# Altium PCB PCB.PcbDoc
Units mm, origin at the board's own origin, x right, y up, seen from the top; angles counter-clockwise.
Board outline 123.95 x 166.88 mm, 2 copper layers (Top Layer, Bottom Layer); 61 components, 65 nets, 280 pads, 86 vias.
Unrouted connection lines stored in the file: 112.
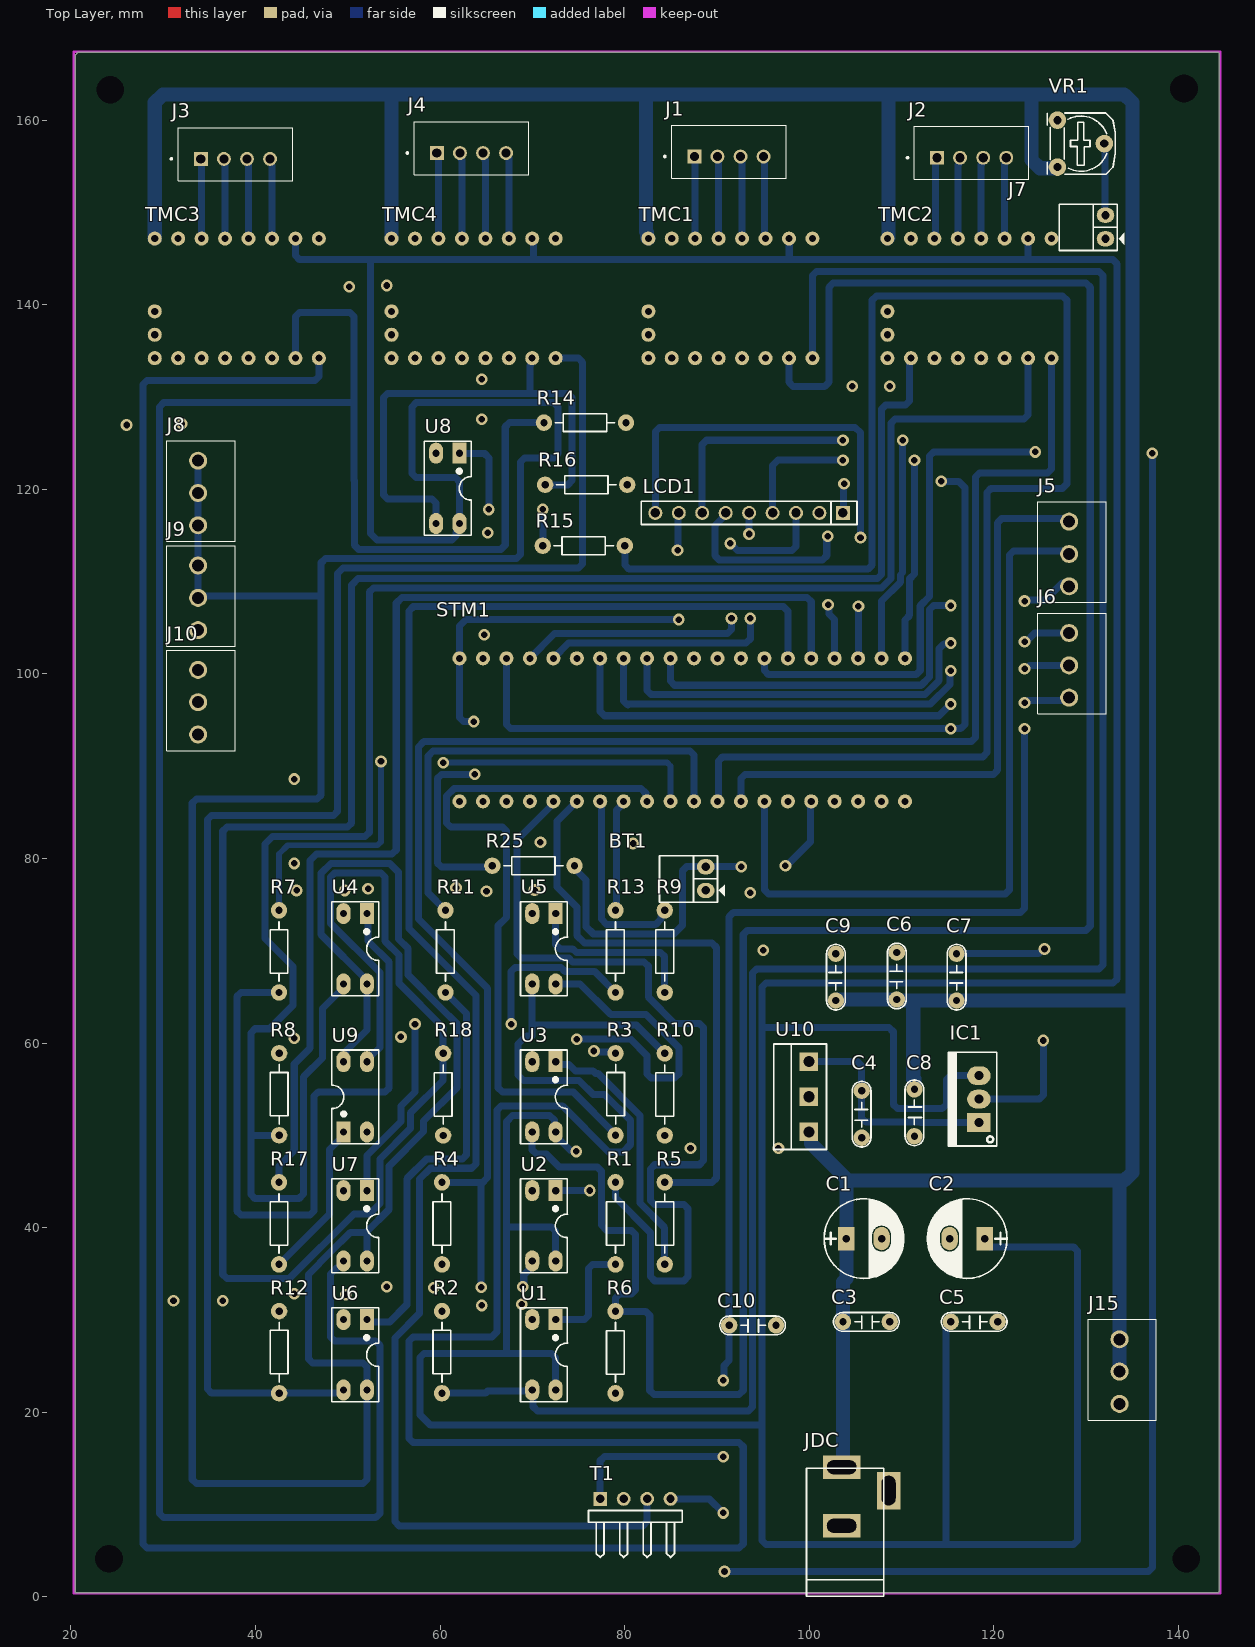
[diagram p0: Top Layer view]
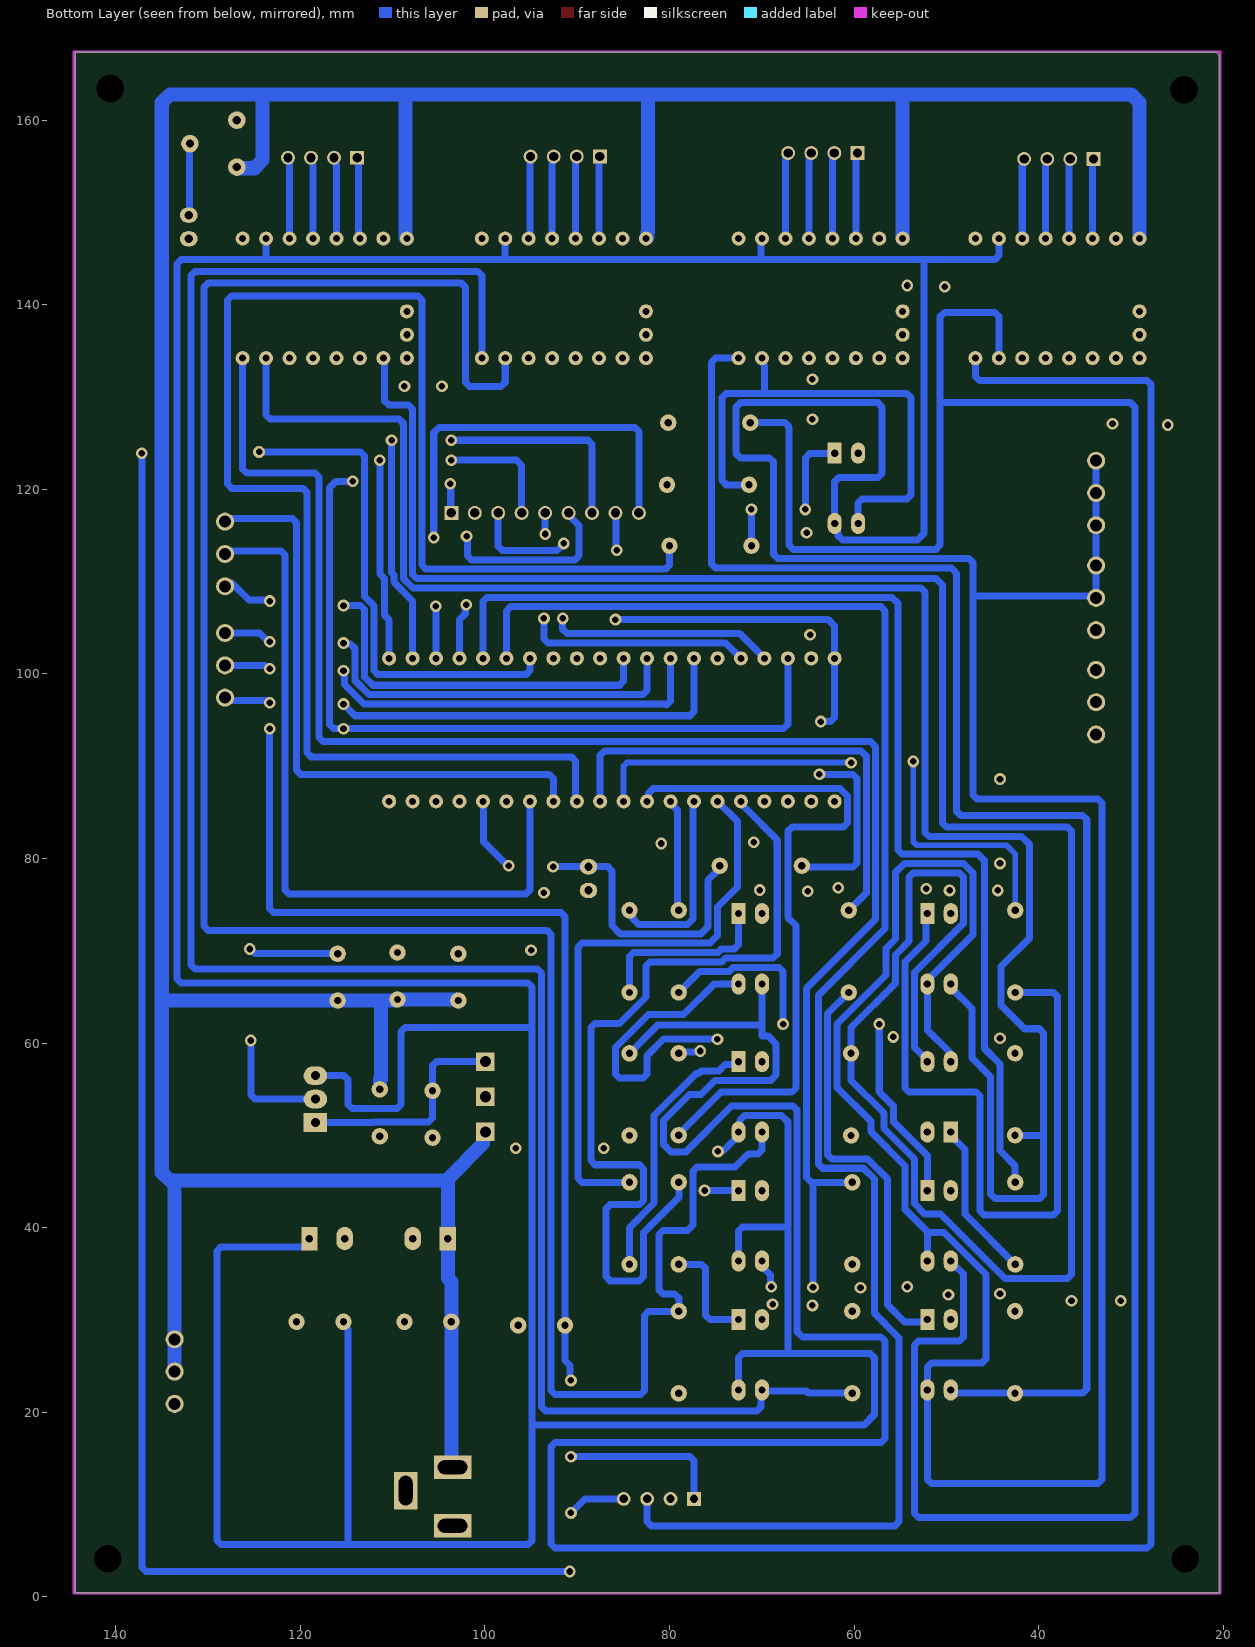
[diagram p1: Bottom Layer view, seen from below]

## Layer stack, top to bottom
Top Solder: solder mask 0.0102, Solder Resist, Dk 3.5
Top Layer: signal copper 0.0356
Dielectric 1: dielectric 0.32, FR-4, Dk 4.8
Bottom Layer: signal copper 0.0356
Bottom Solder: solder mask 0.0102, Solder Resist, Dk 3.5

## Board outline
144.272,0.47 ccw(c144.272,0.597) 144.399,0.597 144.399,167.221 ccw(c144.272,167.221) 144.272,167.348 20.828,167.348 ccw(c20.828,167.221) 20.737,167.311 20.738,167.311 20.484,167.057 ccw(c20.574,166.967) 20.447,166.967 20.447,0.597 ccw(c20.574,0.597) 20.574,0.47

## Design rules (kind name [scope] priority, off if disabled: settings)
Clearance [All] p1: gap=0.254 ignorepadtopadclearanceinfootprint=FALSE
PolygonConnect [All] p1: connectstyle=Relief reliefconductorwidth=0.254 reliefentries=4 polygonreliefangle="90 Angle" airgapwidth=0.254
RoomDefinition sch [InComponentClass('sch')] p1: confinementstyle=ConfineIn formatcopy=TRUE lockcomponents=FALSE outline 184.404,12.827 192.659,12.827 192.659,27.178 184.404,27.178
RoutingVias [All] p1: holewidth=0.711 width=1.27 viastyle="Through Hole" minholewidth=0.711 minwidth=1.27 maxholewidth=0.711 maxwidth=1.27
SolderMaskExpansion [All] p1: expansion=0.102 istentingtop=FALSE
Width [All] p1: maxlimit=0.762 minlimit=0.635 preferedwidth=0.635
30 further rules are at their usual default settings.

## Components (designator, comment, footprint, x,y, rotation, side; value= is the part's Value field where it differs from the comment)
BT1 "Jumper 2" jp2h 88.773,76.543 r90 top value="JP 2"
C1 "100uF" CP1.5/3.4 104.013,38.824 r0 top value=100uF/35V/50V
C2 "100uF" CP1.5/3.4 118.999,38.824 r180 top value=100uF/35V/50V
C3 "100nF" CN2 108.712,29.807 r180 top value=0.1uF
C4 "100nF" CN2 105.664,49.758 r90 top value=0.1uF
C5 "100nF" CN2 120.396,29.807 r180 top value=0.1uF
C6 "100nF" CN2 109.474,64.732 r90 top value=0.1uF
C7 "100nF" CN2 115.951,64.605 r90 top value=0.1uF
C8 "100nF" CN2 111.379,54.991 r270 top value=0.1uF
C9 "100nF" CN2 102.87,64.605 r90 top value=0.1uF
C10 "100nF" CN2 96.393,29.426 r180 top value=0.1uF
IC1 "LM7805" QTO-220 118.364,51.397 r90 top
J1 "B4B-XH-A" JST_B4B-XH-A(LF)(SN) 91.293,156.57 r0 top
J2 "B4B-XH-A" JST_B4B-XH-A(LF)(SN) 117.582,156.443 r0 top
J3 "B4B-XH-A" JST_B4B-XH-A(LF)(SN) 37.826,156.316 r0 top
J4 "B4B-XH-A" JST_B4B-XH-A(LF)(SN) 63.393,156.951 r0 top
J5 "Terminals" 691214110003 128.143,112.992 r270 top
J6 "Terminals" 691214110003 128.143,100.927 r270 top
J7 "Jumper 2" jp2h 132.08,147.13 r90 top value="JP 2"
J8 "Terminals" 691214110003 33.782,119.596 r270 top
J9 "Terminals" 691214110003 33.782,108.237 r270 top
J10 "Terminals" 691214110003 33.782,96.934 r270 top
J15 "Terminals" 691214110003 133.604,24.417 r270 top
JDC "Jac DC" DC-IN 106.045,10.884 r90 top
LCD1 "LCD TFT 2.2" JP9-C1T 93.472,117.437 r180 top
R1 "1k" R1/4W 78.994,44.92 r270 top value="R1/4W - 1K"
R2 "1k" R1/4W 60.198,22.075 r90 top value="R1/4W - 1K"
R3 "1k" R1/4W 79.006,50.015 r90 top value="R1/4W - 1K"
R4 "1k" R1/4W 60.198,44.92 r270 top value="R1/4W - 1K"
R5 "1k" R1/4W 84.328,44.92 r270 top value="R1/4W - 1K"
R6 "1k" R1/4W 78.994,30.95 r270 top value="R1/4W - 1K"
R7 "1k" R1/4W 42.545,74.384 r270 top value="R1/4W - 1K"
R8 "1k" R1/4W 42.557,50.015 r90 top value="R1/4W - 1K"
R9 "1k" R1/4W 84.328,74.384 r270 top value="R1/4W - 1K"
R10 "1k" R1/4W 84.328,58.89 r270 top value="R1/4W - 1K"
R11 "1k" R1/4W 60.579,74.384 r270 top value="R1/4W - 1K"
R12 "1k" R1/4W 42.557,22.075 r90 top value="R1/4W - 1K"
R13 "1k" R1/4W 78.994,74.384 r270 top value="R1/4W - 1K"
R14 "1k" R1/4W 71.247,127.216 r0 top value="R1/4W - 1K"
R15 "1k" R1/4W 80.01,113.881 r180 top value="R1/4W - 1K"
R16 "1k" R1/4W 71.374,120.485 r0 top value="R1/4W - 1K"
R17 "1k" R1/4W 42.545,44.92 r270 top value="R1/4W - 1K"
R18 "1k" R1/4W 60.325,58.89 r270 top value="R1/4W - 1K"
R25 "1k" R1/4W 74.549,79.21 r180 top value="R1/4W - 1K"
STM1 "stm32f103c8t6" STM32F103 110.363,101.689 r270 top
T1 "UART" HDR1X4H 77.343,10.63 r0 top
TMC1 "tmc2209" TMC2209 100.33,147.155 r270 top
TMC2 "tmc2209" TMC2209 126.238,147.155 r270 top
TMC3 "tmc2209" TMC2209 46.863,147.155 r270 top
TMC4 "tmc2209" TMC2209 72.517,147.155 r270 top
U1 "PC817" DIP4/W0.3 72.517,30.048 r180 top
U2 "PC817" DIP4/W0.3 72.517,44.018 r180 top
U3 "PC817" DIP4/W0.3 72.517,57.988 r180 top
U4 "PC817" DIP4/W0.3 52.07,74.031 r180 top
U5 "PC817" DIP4/W0.3 72.517,74.031 r180 top
U6 "PC817" DIP4/W0.3 52.07,30.048 r180 top
U7 "PC817" DIP4/W0.3 52.07,44.018 r180 top
U8 "PC817" DIP4/W0.3 62.103,123.914 r180 top
U9 "PC817" DIP4/W0.3 49.53,50.368 r0 top
U10 "7809" "HDR1x3 BIG" 99.949,50.379 r90 top
VR1 "10K" VR 126.873,159.982 r270 top value="VR 10K"

## Footprints (in the part's own frame and the unit in brackets; to place one, negate y for a bottom-side part, rotate by r counter-clockwise, add the part's x,y. Pads: shape width x height; smd on the part's side, far side on the other; paste and mask are expansions set on the pad)
691214110003 [mm]
  round 1.95 hole 1.3: 1(-3.5,0) 2(0,0) 3(3.5,0)
  silkscreen extent -5.65,-3.4 5.25,4
CN2 [mil]
  round 70 hole 31: 1(0,0) 2(200,0)
  silkscreen extent -40,-40 240,40, body extent -54,-44 260,55, height 407
CP1.5/3.4 [mil] "Tu hoa 220->470uF,16V, 470uF/16V,25V"
  rect 70x100 hole 32: 1(0,0)
  oval 70x100 hole 32: 2(150,0)
  silkscreen extent -95,-170 245,170, body extent -85,-157 230,157, height 446
DC-IN [mm] "Jac DC input"
  rect 2.54x4.064 hole 1.5 slot 3.2 at 90 deg: 1(3.175,2.54) 2(-3.175,2.54)
  rect 4.064x2.54 hole 1.5 slot 3.2 at 0 deg: 3(0.635,-2.54)
  silkscreen extent -10.79,-2.03 3.05,6.35, body extent -10.42,-2.67 3.4,6.84, height 11.02
DIP4/W0.3 [mil] "4 PIN, W 300mil, Pin to pin 100mil"
  rect 60x90 hole 31: 1(0,0)
  oval 60x90 hole 31: 2(100,0) 3(100,300) 4(0,300)
  silkscreen extent -50,-50 150,350, body extent -59,-10 159,305, height 170
"HDR1x3 BIG" [mm] "3 chan cam 7805, BJT to, FET to..."
  rect 2x2 / inner round 1.575 / far side rect 2x2 hole 1.2: 1(0,0) 2(3.81,0) 3(7.62,0)
  silkscreen extent -1.91,-1.91 9.52,3.81
HDR1X4H [mm] "Connector; Header; 4 Position; Right Angle"
  rect 1.5x1.5 hole 0.9: 1(0,0)
  round 1.5 hole 0.9: 2(2.54,0) 3(5.08,0) 4(7.62,0)
  silkscreen extent -1.27,-6.35 8.89,-1.27, body extent -1.27,-7 8.89,1.27, height 4.33
jp2h [mil]
  oval 65x75 hole 36: 1(0,0) 2(101,0)
  silkscreen extent -50,-81 148,197, body extent -44,-14 148,424, height 99
JP9-C1T [mm] "9 row, straight, gold plating"
  rect 1.52x1.52 hole 1.02: 1(-10.16,0)
  round 1.52 hole 1.02: 2(-7.62,0) 3(-5.08,0) 4(-2.54,0) 5(0,0) 6(2.54,0) 7(5.08,0) 8(7.62,0) 9(10.16,0)
  silkscreen extent -11.68,-1.27 11.68,1.27, body extent -11.68,-1.25 11.68,1.25, height 8.51
JST_B4B-XH-A(LF)(SN) [mm]
  rect 1.508x1.508 hole 1: 1(-3.75,-0.525)
  round 1.508 hole 1: 2(-1.25,-0.525) 3(1.25,-0.525) 4(3.75,-0.525)
  silkscreen extent -7.05,-2.87 6.2,2.88
QTO-220 [mil] "TO-220 - 1-2-3"
  rect 80x100 hole 39: 1(0,0)
  oval 80x100 hole 39: 2(100,0) 3(200,0)
  silkscreen extent -100,-76 300,130, body extent -119,-64 322,121, height 755
R1/4W [mil] "R 1/4W, 2 Pin, 350mil"
  round 70 hole 31: 1(0,0) 2(350,0)
  silkscreen extent 48,-38 302,38, body extent -40,-47 386,47, height 111
STM32F103 [mil]
  round 60 hole 30: 1(610,-1900) 2(610,-1800) 3(610,-1700) 4(610,-1600) 5(610,-1500) 6(610,-1400) 7(610,-1300) 8(610,-1200) 9(610,-1100) 10(610,-1000) 11(610,-900) 12(610,-800) 13(610,-700) 14(610,-600) 15(610,-500) 16(610,-400) 17(610,-300) 18(610,-200) 19(610,-100) 20(610,0) 21(0,0) 22(0,-100) 23(0,-200) 24(0,-300) 25(0,-400) 26(0,-500) 27(0,-600) 28(0,-700) 29(0,-800) 30(0,-900) 31(0,-1000) 32(0,-1100) 33(0,-1200) 34(0,-1300) 35(0,-1400) 36(0,-1500) 37(0,-1600) 38(0,-1700) 39(0,-1800) 40(0,-1900)
  body extent -147,-2010 759,265, height 358
TMC2209 [mil]
  round 60 hole 30: 1(0,0) 2(0,-100) 3(0,-200) 4(0,-300) 5(0,-400) 6(0,-500) 7(0,-600) 8(0,-700) 9(310,-700) 10(410,-700) 11(510,-700) 12(510,-600) 13(510,-500) 14(510,-400) 15(510,-300) 16(510,-200) 17(510,-100) 18(510,0)
  body extent -45,-750 555,50, height 541
VR [mil] "Resistor Variable"
  round 75 hole 35: 1(0,0) 2(100,200) 3(200,0)
  silkscreen extent -31,-44 231,246, body extent -87,-30 307,372, height 165

## Part data
BT1 J7: library part "JP 2"
C1 C2: library part CP3, "Cap 100uF/35V - 470uF/16V", Description 1="1000uF/6,3V - 470uF/16V - 330uF - 25V", Description 2="220uF/35V - 100uF/50V - 63V - 4,7uF/200V", Description 3="22uF => 33uF100V - 3,3uF => 4,7uF/250V", Description 4="2,2uF =>3,3uF/350 - 2,2uF/400V - 1uF/450V"
C3 C4 C5 C6 C7 C8 C9 C10: library part CN2, "Cap np 104 => 105pF"
IC1: library part LM78xx, "On ap +, from + 5 to + 24VDC"
J1 J2 J3 J4: library part B4B-XH-A(LF)(SN), Package=None, Availability=Unavailable, MP=B4B-XH-A(LF)(SN), Price=None
J5 J6 J8 J9 J10 J15: library part 691214110003, "3 Position Wire to Board Terminal Block Horizontal with Board 0.138 (3.50mm) Through Hole", Package=None, Availability="In Stock", Check_prices=https://www.snapeda.com/parts/691214110003/Wurth+Elektronik/view-part/?ref=eda, MF="Wurth Elektronik", MP=691214110003, Price=None, Purchase-URL=https://pricing.snapeda.com/search/part/691214110003/?ref=eda, SnapEDA_Link=https://www.snapeda.com/parts/691214110003/Wurth+Elektronik/view-part/?ref=snap
JDC: library part DCIN, "Jac DC input"
LCD1: Manufacturer="W¨¹rth Elektronik eiSos GmbH", partNo=613009143121, ComponentLink1 Description=Manufacturer, ComponentLink1URL=http://www.we-online.com, ComponentLink2 Description=Datasheet, ComponentLink2URL=http://katalog.we-online.de/em/datasheet/6130xx143121.pdf, Created by="Karrer Zheng", Created Date="29 March 2013", NoPins=09
R1 R2 R3 R4 R5 R6 R7 R8 R9 R10 R11 R12 R13 R14 R15 R16 R17 R18 R25: library part R1/4W, "Resistor 1/4W"
STM1: library part STM32F103
T1: library part TouchPanel, "4 wires", Creator="Nguyen Ba Bien", Date Created=14-04-2010
TMC1 TMC2 TMC3 TMC4: library part Driver_TMC2209
U1 U2 U3 U4 U5 U6 U7 U8 U9: "Single Opto"
U10: "Positive Voltage Regulator", ComponentLink1Description="Manufacturer Link", ComponentLink1URL=http://www.st.com/, ComponentLink2Description=Datasheet, ComponentLink2URL=http://www.st.com/stonline/products/literature/ds/2146/l78m05c.pdf, DatasheetVersion=Apr-1994, LatestRevisionDate=17-Jul-2002, LatestRevisionNote="Re-released for DXP Platform.", Note="Tab is connected to pin 3 (GND).", PackageDescription="SIP; 3 Leads; Body 10.9 x 7.6 x 2.6 mm (typ); Pitch 2.2 mm", PackageReference=SOT82C, Published=24-Aug-2001, Publisher="Altium Limited"
VR1: library part VR, "Var Resistor"

## Free pads (board coordinates)
  round 1.524 hole 3: 2(24.13,4.153) 3(24.257,163.284) 4(140.589,163.411) 5(140.843,4.153)
  round 1.524 hole 0.762: 6(102.489,7.709) 7(103.505,7.709) 8(104.521,7.709) 9(102.616,14.059) 10(103.505,14.059) 11(104.521,14.059) 12(108.585,10.503)

## Via types
v1: diameter 1.27, hole 0.711, Top Layer to Bottom Layer, 86 vias

## Nets (pads, with @x,y where several pads share a name; then routed paths per layer and width w, separated by ;. In a path a pad name is that pad's centre, name@x,y a point inside that pad or via, vN(x,y) a via of type N, cw(c..) or ccw(c..) an arc to the next point about the centre after c; other vN are vias at no path point)
3V3: LCD1.8 R25.2 STM1.40 | length 59.4
  Bottom Layer w0.762: v1(63.627,94.831) 62.549,94.831 62.103,95.277 STM1.40 62.103,105.18 62.803,105.88 v1(85.852,105.88) ; v1(63.754,89.116) 60.136,89.116 59.69,88.67 59.69,79.529 60.136,79.083 65.532,79.083 R25.2 ; v1(85.725,113.383) 85.788,113.447 85.788,117.373 LCD1.8
5V: C2.1 C5.2 IC1.3 J8.1 J8.2 J8.3 J9.1 J9.2 TMC1.2 TMC2.2 TMC3.2 TMC4.2 U1.4 U2.4 U3.4 U4.4 U5.4 U6.4 U7.4 U8.4 U9.4 | length 943.6
  Bottom Layer w0.762: J8.1 J8.2 J8.3 J9.1 J9.2 33.965,108.42 47.117,108.42 ; TMC3.2 44.323,145.315 44.769,144.869 52.451,144.869 ; U9.4 49.676,58.134 49.676,59.036 52.07,61.43 52.07,66.792 47.117,71.745 47.117,78.422 48.159,79.464 54.545,79.464 55.499,78.51 55.499,71.296 56.54,70.255 56.54,67.377 59.948,63.97 61.849,62.069 61.849,55.207 58.191,51.549 58.191,50.406 54.483,46.698 54.483,41.999 52.023,39.539 ; U7.4 52.07,39.492 50.267,39.492 48.133,37.358 45.72,34.945 45.72,25.808 46.166,25.362 51.624,25.362 52.07,24.916 U6.4 52.07,12.727 51.624,12.281 33.593,12.281 33.147,12.727 33.147,86.003 33.593,86.449 46.671,86.449 47.117,86.895 47.117,108.42 ; TMC4.2 70.104,147.028 70.104,144.869 ; U1.4 72.517,25.932 72.071,26.378 67.183,26.378 ; U2.4 72.517,39.628 72.071,40.075 67.183,40.075 ; U5.4 75.156,66.411 78.485,63.081 82.292,63.081 85.852,59.521 85.852,56.669 85.406,56.223 82.869,56.223 82.423,56.669 82.423,58.636 80.63,60.429 74.818,60.429 v1(74.803,60.414) ; v1(74.754,48.271) 74.657,48.368 74.137,48.368 72.517,49.987 U3.4 72.371,50.514 72.371,51.652 71.864,52.159 67.858,52.159 67.183,51.484 67.183,40.075 ; 94.742,18.605 58.942,18.605 57.812,19.736 57.812,25.932 58.258,26.378 67.183,26.378 ; TMC1.2 97.821,147.124 97.821,144.996 ; C5.2 115.316,29.532 114.808,29.024 114.808,5.677 ; IC1.3 115.283,56.477 114.836,56.031 114.836,53.367 114.39,52.921 109.539,52.921 109.093,53.367 109.093,61.238 108.647,61.684 94.869,61.684 ; C2.1 118.999,38.443 119.507,37.935 128.586,37.935 129.032,37.489 129.032,17.426 129.032,6.123 128.586,5.677 114.808,5.677 ; TMC2.2 123.698,144.869 ; 47.117,108.42 47.117,112.038 47.563,112.484 68.261,112.484 68.707,112.93 68.707,122.96 69.153,123.406 72.325,123.406 72.771,123.852 72.771,128.929 72.325,129.375 57.404,129.375 56.958,128.929 56.958,121.709 57.404,121.262 61.657,121.262 62.103,120.816 U8.4 62.103,115.707 61.722,115.326 61.722,114.962 61.276,114.516 53.151,114.516 52.451,115.216 52.451,144.869 ; 52.451,144.869 70.104,144.869 ; 67.183,26.378 67.183,40.075 ; 70.104,144.869 97.821,144.869 123.698,144.869 ; 94.869,61.684 94.869,18.605 94.869,6.123 95.315,5.677 114.808,5.677 ; 94.869,61.684 94.869,66.064 95.315,66.51 132.904,66.51 133.35,66.956 133.35,144.423 132.904,144.869 123.698,144.869
5VSTM: C10.2 LCD1.1 STM1.38 T1.1 | length 208.9
  Bottom Layer w0.762: STM1.38 67.183,94.515 67.629,94.069 v1(115.316,94.069) 116.394,94.069 116.84,94.515 116.84,120.166 116.14,120.866 v1(114.3,120.866) ; T1.1 77.343,14.756 77.789,15.202 v1(90.678,15.202) ; v1(90.678,23.457) 90.775,23.554 90.775,25.078 91.313,25.616 C10.2 91.313,73.684 91.759,74.13 122.871,74.13 123.317,74.576 v1(123.317,94.069) ; LCD1.1 103.695,117.5 103.695,120.548 v1(103.759,120.612)
12V: C1.1 C3.2 C6.1 C7.1 C8.1 C9.1 J15.1 J15.2 JDC.1 pad.9 pad.10 pad.11 TMC1.8 TMC2.8 TMC3.8 TMC4.8 U10.1 VR1.3 | length 426.2
  Bottom Layer w0.762: 133.604,44.593 134.108,45.098
  Bottom Layer w1.524: TMC3.8 29.083,161.883 29.976,162.776 54.737,162.776 ; TMC4.8 54.737,162.776 ; TMC1.8 82.404,147.301 82.404,147.84 82.309,147.935 82.309,162.776 ; U10.1 100.187,50.141 100.187,49.127 104.013,45.301 104.013,45.098 ; C9.1 102.939,64.605 103.066,64.732 109.543,64.732 109.67,64.605 111.252,64.605 ; pad.10 103.505,14.44 103.632,14.567 C3.2 103.632,34.125 104.013,34.506 C1.1 104.013,45.098 ; TMC2.8 108.585,147.282 108.585,162.776 ; 111.252,56.096 111.252,64.605 ; C8.1 111.379,56.096 ; VR1.3 126.8,154.829 126.531,154.829 126.477,154.775 124.972,154.775 124.079,155.668 124.079,162.776 ; J15.2 J15.1 133.604,44.593 ; 134.239,64.605 C7.1 111.252,64.605 ; 54.737,162.776 82.309,162.776 ; 82.309,162.776 108.585,162.776 ; 104.013,45.098 134.108,45.098 135.001,45.99 135.001,64.605 135.001,161.883 134.108,162.776 124.079,162.776 ; 108.585,162.776 124.079,162.776
A0: R1.1 STM1.5 | length 95.6
  Bottom Layer w0.762: STM1.5 72.263,85.989 71.882,85.608 71.882,85.56 68.326,82.004 68.326,69.651 68.772,69.205 73.933,69.205 74.342,68.796 82.104,68.796 82.55,68.35 82.55,64.986 85.407,62.128 88.073,62.128 88.519,61.682 88.519,47.271 88.073,46.825 83.25,46.825 82.804,46.379 82.804,42.953 83.25,42.507 86.422,42.507 86.868,42.061 86.868,34.698 86.422,34.252 83.25,34.252 82.804,34.698 82.804,39.459 78.994,43.269 R1.1
A1: R5.1 STM1.6 | length 62.8
  Bottom Layer w0.762: STM1.6 72.644,84.036 72.644,76.924 74.803,74.765 74.803,71.655 75.63,70.828 89.47,70.828 89.916,70.382 89.916,45.366 89.47,44.92 R5.1
A2: R9.1 STM1.7 | length 20.9
  Bottom Layer w0.762: STM1.7 77.47,86.068 77.47,73.433 78.043,72.86 83.356,72.86 83.929,73.433 83.929,73.71 84.328,74.109 R9.1
A3: R13.1 STM1.8 | length 12.2
  Bottom Layer w0.762: R13.1 79.121,74.511 79.121,85.227 79.883,85.989 STM1.8
A4: R3.1 STM1.9 | length 75.9
  Bottom Layer w0.762: R3.1 79.006,50.115 74.422,54.699 66.74,54.699 66.294,55.145 66.294,72.733 67.183,73.622 67.183,82.955 66.737,83.401 61.152,83.401 60.706,83.847 60.706,86.774 61.524,87.592 81.757,87.592 82.277,87.072 82.277,86.341 STM1.9
A5: R7.1 STM1.10 | length 55
  Bottom Layer w0.635: R7.1 42.545,80.489 43.488,81.432 53.222,81.432 53.594,81.804 v1(53.594,90.513) ; v1(60.325,90.386) 84.591,90.386 84.963,90.014 STM1.10
A6: R11.1 STM1.11 | length 51.8
  Bottom Layer w0.762: R11.1 58.674,76.289 58.674,91.083 59.247,91.656 87.057,91.656 87.503,91.21 STM1.11
A7: R15.1 STM1.12 | length 170.4
  Bottom Layer w0.762: R15.1 80.01,111.787 80.456,111.341 106.361,111.341 106.807,111.787 106.807,140.486 107.253,140.932 127.443,140.932 127.889,140.486 127.889,120.55 127.443,120.104 119.699,120.104 119.253,119.658 119.253,91.467 118.807,91.021 90.616,91.021 90.17,90.575 90.17,86.322 STM1.12
A8: R17.1 STM1.25 | length 124.4
  Bottom Layer w0.762: R17.1 42.545,46.698 44.196,48.349 44.196,57.747 45.898,59.449 45.898,79.78 46.598,80.48 54.799,80.48 55.245,80.926 55.245,107.658 55.88,108.293 99.757,108.293 100.203,107.847 STM1.25
CS: LCD1.3 STM1.37 | length 35.6
  Bottom Layer w0.762: STM1.37 72.39,104.356 91.121,104.356 91.567,104.802 v1(91.567,106.007) ; v1(91.44,114.135) 92.202,113.373 98.106,113.373 98.552,113.819 LCD1.3
DC: LCD1.5 STM1.36 | length 26.7
  Bottom Layer w0.762: STM1.36 73.914,103.34 93.153,103.34 93.599,103.786 v1(93.599,106.007) ; v1(93.472,115.151) LCD1.5
DirB: R12.1 TMC4.18 U6.3 | length 168.9
  Bottom Layer w0.762: U6.3 49.178,22.075 R12.1 35.244,22.075 34.798,22.521 34.798,84.225 35.244,84.671 48.449,84.671 48.895,85.117 48.895,110.895 49.468,111.468 74.992,111.468 75.438,111.914 75.438,133.755 74.992,134.201 TMC4.18
DirX: R2.1 TMC1.18 U1.3 | length 236.7
  Bottom Layer w0.762: R2.1 64.925,22.075 65.157,22.308 U1.3@69.977,22.308 ; U1.3 70.082,22.323 70.082,20.601 70.529,20.155 93.407,20.155 93.853,20.601 93.853,67.588 94.299,68.034 131.38,68.034 131.826,68.48 131.826,143.153 131.38,143.599 100.776,143.599 100.33,143.153 TMC1.18
DirY: R10.1 TMC3.18 U5.3 | length 364.3
  Bottom Layer w0.762: TMC3.18 46.863,132.234 46.417,131.788 28.259,131.788 27.813,131.342 27.813,5.742 28.259,5.296 92.391,5.296 92.837,5.742 92.837,16.28 92.391,16.726 57.088,16.726 56.642,17.172 56.642,27.71 57.088,28.156 65.594,28.156 66.167,28.729 66.167,52.729 66.613,53.175 73.279,53.175 78.232,48.222 79.821,48.222 80.645,49.046 80.645,51.611 77.811,54.445 76.581,54.445 75.057,55.969 69.026,55.969 68.453,56.542 68.453,59.906 69.342,60.795 69.977,60.795 69.977,61.938 ; U5.3 69.977,61.938 ; R10.1 81.28,61.938 69.977,61.938
DirZ: R4.1 TMC2.18 U2.3 | length 179.1
  Bottom Layer w0.762: R4.1 64.451,44.92 64.451,44.727 ; v1(64.451,33.555) 64.451,44.727 ; v1(68.961,33.617) 69.058,33.714 69.058,34.892 69.977,35.811 U2.3 ; TMC2.18 126.238,122.201 125.792,121.755 118.429,121.755 117.983,121.309 117.983,93.118 117.537,92.672 58.231,92.672 57.658,92.099 57.658,73.433 65.151,65.94 65.151,45.428 64.451,44.727
GND: BT1.1 C1.2 C2.2 C3.1 C4.1 C5.1 C6.2 C7.2 C8.2 C9.2 C10.1 IC1.2 J7.1 J9.3 J10.1 J10.2 J10.3 J15.3 JDC.2 JDC.3 LCD1.2 pad.6 pad.7 pad.8 pad.12 R2.2 R4.2 R6.2 R8.2 R10.2 R12.2 R14.2 R16.2 R18.2 STM1.39 T1.2 TMC1.1 TMC1.7 TMC1.11 TMC2.1 TMC2.7 TMC2.11 TMC3.1 TMC3.7 TMC3.11 TMC4.1 TMC4.7 TMC4.11 U1.2 U2.2 U3.2 U4.2 U5.2 U6.2 U7.2 U8.2 U9.2 U10.2 VR1.1 | length 24.1
  Top Layer w0.635: v1(108.585,11.519) v1(108.585,12.446)
  Bottom Layer w0.762: R10.2 R10.2@84.602,50 ; v1@87.025,48.7 v1(87.122,48.603) ; C7.2 124.831,69.685 125.339,70.193 v1(125.476,70.193) ; IC1.2 124.903,53.937 125.349,54.383 v1(125.349,60.287)
  other v1: 64.516,31.585 68.834,31.712 31.115,32.093 36.449,32.093 49.784,32.728 44.196,32.855 59.309,33.49 54.229,33.617 96.647,48.603 44.196,60.541 55.753,60.668 94.996,70.066 93.599,76.289 65.024,76.454 44.45,76.543 49.657,76.543 70.231,76.581 52.197,76.708 61.722,76.835 44.196,79.464 80.899,81.623 70.866,81.75 44.196,88.608 64.77,104.229 65.151,115.278 26.035,126.962 32.004,127.089 64.516,127.597 104.648,131.153 108.712,131.153 64.516,131.915 50.165,141.948 54.229,142.075
Itr_BT: BT1.2 R25.1 STM1.16 | length 38.9
  Bottom Layer w0.762: R25.1 74.549,78.935 75.821,77.663 75.821,72.604 76.581,71.844 85.344,71.844 86.233,72.733 86.233,78.662 86.679,79.108 BT1.2 88.776,79.111 92.612,79.111 v1(92.615,79.115) ; v1(97.409,79.21) 97.536,79.21 100.139,81.813 100.139,86.131 STM1.16
Itr_X: J5.1 STM1.13 | length 64.6
  Bottom Layer w0.762: STM1.13 92.583,88.67 93.029,89.116 119.95,89.116 120.396,89.562 120.396,116.371 120.842,116.817 J5.1@127.381,116.817
Itr_X1: J6.1 STM1.32 | length 45.4
  Bottom Layer w0.762: STM1.32 82.423,98.198 82.869,97.752 112.536,97.752 114.046,99.262 114.046,102.727 114.562,103.243 115.219,103.243 v1(115.316,103.34) ; v1@123.063,103.467 v1@123.2,103.467 ; v1@123.454,103.467 124.414,104.427 J6.1@127.381,104.427
  other v1: 123.317,103.467
Itr_Y: J5.2 STM1.14 | length 78.7
  Bottom Layer w0.762: STM1.14 95.123,76.608 95.569,76.162 121.22,76.162 121.666,76.608 121.666,112.871 122.112,113.317 J5.2@127.381,113.317
Itr_Y1: J6.2 STM1.33 | length 47.6
  Bottom Layer w0.762: STM1.33 79.883,97.055 80.329,96.609 80.456,96.736 113.098,96.736 115.219,98.856 115.219,100.254 v1(115.316,100.352) ; v1(123.317,100.546) 123.454,100.546 123.835,100.927 J6.2
Itr_Z: J5.3 STM1.31 | length 45.8
  Bottom Layer w0.762: STM1.31 84.963,99.214 85.409,98.768 112.115,98.768 113.03,99.682 113.03,106.958 113.476,107.404 v1(115.316,107.404) ; v1@123.063,107.888 v1@123.16,107.986 ; v1@123.317,107.986 125.55,107.986 J5.3@127.381,109.817
  other v1: 123.317,107.888
Itr_Z1: J6.3 STM1.34 | length 49.6
  Bottom Layer w0.762: STM1.34 77.343,95.912 77.789,95.466 114.055,95.466 v1(115.316,96.727) ; v1@123.2,96.863 v1(123.317,96.863) 123.454,96.863 123.708,97.117 127.833,97.117 J6.3
MISO: LCD1.9 STM1.23 | length 48.5
  Bottom Layer w0.762: LCD1.9 83.312,126.262 83.758,126.708 104.964,126.708 105.537,126.135 v1(105.537,114.77) ; STM1.23 105.301,101.707 105.301,107.295 v1(105.319,107.313)
MOSI: LCD1.6 STM1.24 | length 25.8
  Bottom Layer w0.762: LCD1.6 90.932,117.232 89.789,116.089 89.789,112.803 90.235,112.357 101.437,112.357 101.884,112.803 101.884,114.8 v1(101.981,114.897) ; v1(102.03,107.482) 102.127,107.385 102.127,106.496 102.743,105.88 STM1.24
MS1_Z: R18.1 TMC2.12 U9.3 | length 262.5
  Bottom Layer w0.762: U9.3 52.07,58.163 52.657,58.75 52.692,58.75 53.467,59.525 53.467,67.653 48.133,72.987 48.133,78.002 48.579,78.448 53.592,78.448 54.038,78.002 54.038,71.039 55.524,69.553 55.524,66.484 60.325,61.684 R18.1 60.325,55.969 56.769,52.413 56.769,50.762 53.467,47.46 53.467,42.612 52.362,41.507 50.65,41.507 43.648,34.506 36.895,34.506 36.449,34.952 36.449,82.955 36.895,83.401 49.973,83.401 50.419,83.847 50.419,109.625 51.119,110.325 107.377,110.325 107.823,110.771 107.823,128.675 108.269,129.121 110.406,129.121 110.852,129.567 110.852,134.055 TMC2.12
NetC4_2: C4.2 IC1.1 U10.3 | length 24.5
  Bottom Layer w0.762: U10.3 105.218,57.999 105.664,57.553 105.664,51.881 106.11,51.435 112.01,51.435 112.048,51.397 IC1.1
NetJ1_1: J1.1 TMC1.6 | length 8.9
  Bottom Layer w0.762: J1.1 87.63,155.958 TMC1.6
NetJ1_2: J1.2 TMC1.5 | length 8.9
  Bottom Layer w0.762: J1.2 90.17,155.918 TMC1.5
NetJ1_3: J1.3 TMC1.4 | length 9
  Bottom Layer w0.762: J1.3 92.686,155.902 92.686,155.375 92.71,155.35 TMC1.4
NetJ1_4: J1.4 TMC1.3 | length 9
  Bottom Layer w0.762: J1.4 95.123,155.965 95.123,147.282 TMC1.3
NetJ2_1: J2.1 TMC2.6 | length 8.9
  Bottom Layer w0.762: TMC2.6 113.665,147.282 113.665,155.751 J2.1
NetJ2_2: J2.2 TMC2.5 | length 8.9
  Bottom Layer w0.762: TMC2.5 116.078,155.136 116.189,155.248 116.189,155.775 J2.2
NetJ2_3: J2.3 TMC2.4 | length 8.9
  Bottom Layer w0.762: TMC2.4 118.618,155.176 118.689,155.248 118.689,155.775 J2.3
NetJ2_4: J2.4 TMC2.3 | length 8.8
  Bottom Layer w0.762: TMC2.3 121.158,155.216 121.189,155.248 121.189,155.775 J2.4
NetJ3_1: J3.1 TMC3.6 | length 8.7
  Bottom Layer w0.762: J3.1 34.163,155.704 TMC3.6
NetJ3_2: J3.2 TMC3.5 | length 8.7
  Bottom Layer w0.762: J3.2 36.703,155.664 TMC3.5
NetJ3_3: J3.3 TMC3.4 | length 8.7
  Bottom Layer w0.762: J3.3 39.219,155.648 39.219,155.121 39.243,155.096 TMC3.4
NetJ3_4: J3.4 TMC3.3 | length 8.7
  Bottom Layer w0.762: J3.4 41.719,155.648 41.719,155.121 41.783,155.056 TMC3.3
NetJ4_1: J4.1 TMC4.6 | length 9.3
  Bottom Layer w0.762: J4.1 59.817,156.252 TMC4.6
NetJ4_2: J4.2 TMC4.5 | length 9.4
  Bottom Layer w0.762: J4.2 62.286,156.283 62.286,155.756 62.357,155.684 TMC4.5
NetJ4_3: J4.3 TMC4.4 | length 9.4
  Bottom Layer w0.762: J4.3 64.786,156.283 64.786,155.756 64.897,155.644 TMC4.4
NetJ4_4: J4.4 TMC4.3 | length 9.4
  Bottom Layer w0.762: J4.4 67.143,156.224 67.437,155.93 TMC4.3
NetJ7_2: J7.2 VR1.2 | length 7.4
  Bottom Layer w0.762: VR1.2@131.953,157.061 132.017,156.997 132.017,149.758 J7.2
NetR1_2: R1.2 U1.1 | length 11.9
  Bottom Layer w0.762: U1.1 75.627,30.048 76.073,30.495 76.073,35.584 76.519,36.03 R1.2
NetR3_2: R3.2 U2.1 | length 6.1
  Bottom Layer w0.762: U2.1 72.53,44.031 v1(76.2,44.031) ; v1(76.664,59.144) 76.761,59.047 78.865,59.047 R3.2
NetR5_2: R5.2 U3.1 | length 28.8
  Bottom Layer w0.762: U3.1 72.839,57.666 73.976,57.666 74.657,56.985 76.581,56.985 76.835,56.731 77.089,56.731 81.661,52.159 81.661,42.659 84.328,39.992 R5.2
NetR7_2: R7.2 U4.1 | length 77.6
  Bottom Layer w0.762: R7.2 38.419,65.494 37.973,65.048 37.973,41.81 38.419,41.364 45.909,41.364 46.355,41.81 46.355,54.253 46.801,54.699 54.037,54.699 54.483,55.145 54.483,68.796 52.197,71.082 52.197,73.904 U4.1
NetR9_2: R9.2 U5.1 | length 19.6
  Bottom Layer w0.762: U5.1 72.517,70.667 72.963,70.221 74.354,70.221 74.763,69.812 83.882,69.812 84.328,69.366 R9.2
NetR11_2: R11.2 U6.1 | length 45.1
  Bottom Layer w0.762: U6.1 52.07,29.807 54.545,29.807 56.388,31.65 56.388,45.301 58.547,47.46 62.419,47.46 62.865,47.906 62.865,63.208 R11.2
NetR13_2: R13.2 U7.1 | length 38.5
  Bottom Layer w0.762: U7.1 52.07,47.841 55.753,51.524 55.753,53.175 57.277,54.699 v1(57.277,62.065) ; v1(67.691,62.065) 67.691,67.742 68.137,68.189 73.096,68.189 73.505,67.78 76.708,67.78 R13.2
NetR15_2: R15.2 U8.1 | length 12.9
  Bottom Layer w0.762: U8.1 62.164,123.852 64.832,123.852 65.278,123.406 v1(65.278,117.818) ; R15.2 v1(71.12,117.818)
NetR17_2: R17.2 U9.1 | length 17.2
  Bottom Layer w0.762: R17.2 48.006,41.491 48.006,48.463 49.53,49.987 U9.1
RST: LCD1.4 STM1.21 | length 34.9
  Bottom Layer w0.762: LCD1.4 96.012,122.579 96.585,123.152 v1(103.632,123.152) ; STM1.21 110.363,105.849 110.871,106.357 110.871,110.311 111.379,110.819 v1(111.379,123.152)
RX1: STM1.27 T1.4 | length 227.5
  Bottom Layer w0.762: T1.4 89.154,10.63 v1(90.678,9.106) ; v1(90.805,2.756) 136.714,2.756 137.16,3.202 v1(137.16,123.914) ; STM1.27 95.123,100.357 95.569,99.911 111.568,99.911 112.014,100.357 112.014,107.378 113.03,108.394 113.03,123.595 113.476,124.041 v1(124.46,124.041)
SCK: LCD1.7 STM1.22 | length 47.4
  Bottom Layer w0.762: LCD1.7 88.392,124.865 88.838,125.311 v1(103.632,125.311) ; STM1.22 107.823,107.898 109.855,109.93 109.855,110.731 110.109,110.985 v1(110.109,125.311)
StepB: R16.1 TMC4.17 U8.3 | length 55.4
  Bottom Layer w0.762: U8.3 59.563,118.515 59.117,118.961 54.292,118.961 53.846,119.407 53.846,129.945 54.292,130.391 73.849,130.391 74.295,129.945 74.295,125.565 74.295,120.931 73.849,120.485 R16.1 ; 69.723,130.645 69.723,133.408 69.831,133.516 69.831,134.055 TMC4.17
StepX: R6.1 TMC1.17 U3.3 | length 255.6
  Bottom Layer w0.762: U3.3 69.977,48.414 70.423,47.968 71.501,47.968 72.898,46.571 77.024,46.571 77.47,46.125 77.47,40.286 78.043,39.713 80.707,39.713 81.153,39.267 81.153,33.277 80.707,32.831 79.44,32.831 78.994,32.384 R6.1 82.262,30.95 82.709,30.504 82.709,22.379 83.155,21.933 92.391,21.933 92.837,22.379 92.837,71.779 93.283,72.225 129.983,72.225 130.429,72.671 130.429,141.883 129.983,142.329 102.554,142.329 102.108,141.883 102.108,131.599 101.662,131.153 98.236,131.153 97.79,131.599 TMC1.17
StepY: R14.1 TMC3.17 U7.3 | length 268.1
  Bottom Layer w0.762: TMC3.17 44.323,138.708 44.769,139.154 50.227,139.154 50.673,138.708 50.673,129.375 ; U7.3 49.53,36.223 48.943,35.636 48.781,35.636 48.133,34.989 48.133,28.158 48.579,27.711 53.021,27.711 53.467,27.265 53.467,9.044 53.021,8.598 30.037,8.598 29.591,9.044 29.591,128.929 30.037,129.375 50.673,129.375 ; 50.673,120.929 50.673,129.375 ; 50.698,120.929 50.698,113.946 51.145,113.5 66.61,113.5 67.056,113.946 67.056,126.77 67.502,127.216 R14.1
StepZ: R8.1 TMC2.17 U4.3 | length 209
  Bottom Layer w0.762: R8.1 42.542,50 39.497,50 ; U4.3 49.53,66.03 47.244,63.744 47.244,58.382 45.212,56.35 45.212,43.664 44.689,43.142 39.943,43.142 39.497,43.588 39.497,50 ; TMC2.17 123.698,128.043 123.252,127.597 109.285,127.597 108.839,127.151 108.839,110.35 107.797,109.309 52.77,109.309 52.324,108.863 52.324,82.831 51.878,82.385 41.848,82.385 41.021,81.558 41.021,71.336 44.069,68.288 44.069,64.097 41.529,61.557 39.943,61.557 39.497,61.111 39.497,50
TX1: STM1.26 T1.3 | length 184.6
  Bottom Layer w0.762: T1.3 82.423,8.155 81.977,7.709 55.564,7.709 55.118,8.155 55.118,28.069 57.785,30.736 57.785,45.261 58.968,46.444 63.415,46.444 63.881,46.91 63.881,65.178 56.642,72.417 56.642,106.831 57.088,107.277 97.217,107.277 97.663,106.831 STM1.26
pads on no net: STM1.1 STM1.2 STM1.3 STM1.4 STM1.15 STM1.17 STM1.18 STM1.19 STM1.20 STM1.28 STM1.29 STM1.30 STM1.35 TMC1.9 TMC1.10 TMC1.12 TMC1.13 TMC1.14 TMC1.15 TMC1.16 TMC2.9 TMC2.10 TMC2.13 TMC2.14 TMC2.15 TMC2.16 TMC3.9 TMC3.10 TMC3.12 TMC3.13 TMC3.14 TMC3.15 TMC3.16 TMC4.9 TMC4.10 TMC4.12 TMC4.13 TMC4.14 TMC4.15 TMC4.16

## Keep-outs
Keep-Out Layer:
  lines w0.254: 20.32,127.127 20.32,127.127 ; 20.32,127.127 20.32,129.667 20.32,132.842 20.32,167.386 144.526,167.386 144.526,90.678 144.526,0.381 20.32,0.381 20.32,127.127

## Text inside footprints (layer, text, board x,y; h text height)
J5: Mechanical 13 "1" at 125.393,116.992 h1.27 r270
J6: Mechanical 13 "1" at 125.393,104.927 h1.27 r270
J8: Mechanical 13 "1" at 31.032,123.596 h1.27 r270
J9: Mechanical 13 "1" at 31.032,112.237 h1.27 r270
J10: Mechanical 13 "1" at 31.032,100.934 h1.27 r270
J15: Mechanical 13 "1" at 130.854,28.417 h1.27 r270